# Altium PCB ra1.PcbDoc
Units mil, origin at the board's own origin, x right, y up, seen from the top; angles counter-clockwise.
Board outline 1125 x 500 mil, 2 copper layers (Top Layer, Bottom Layer); 6 components, 2 nets, 24 pads, 0 vias.
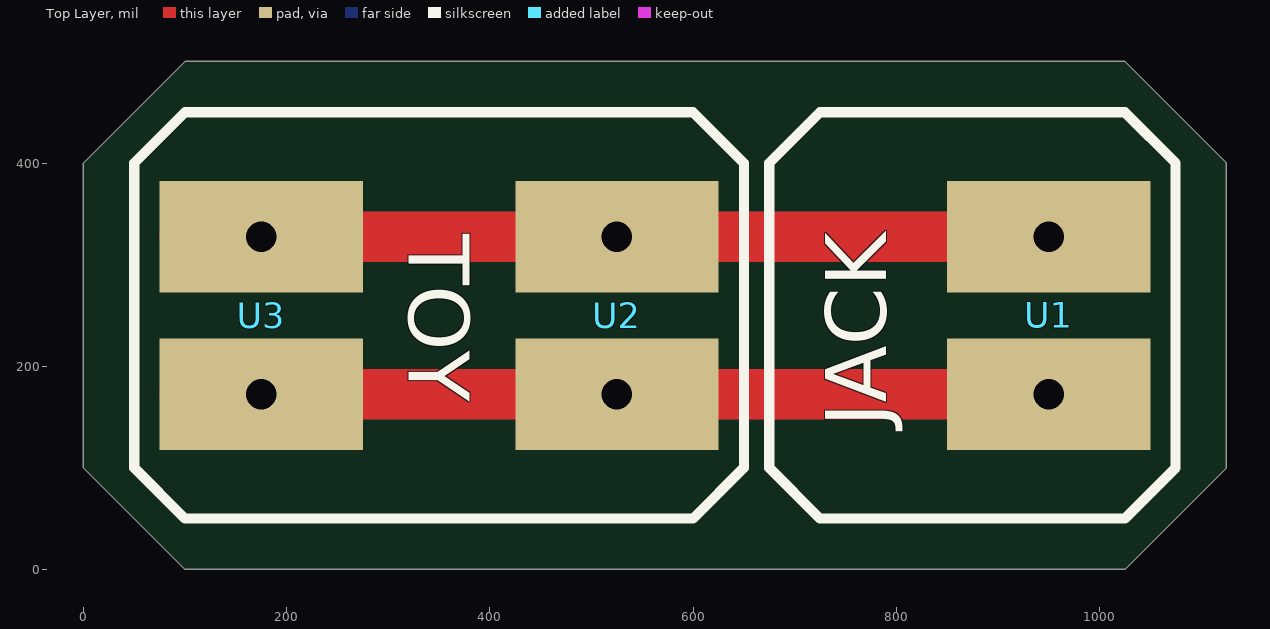
[diagram p0: Top Layer view]
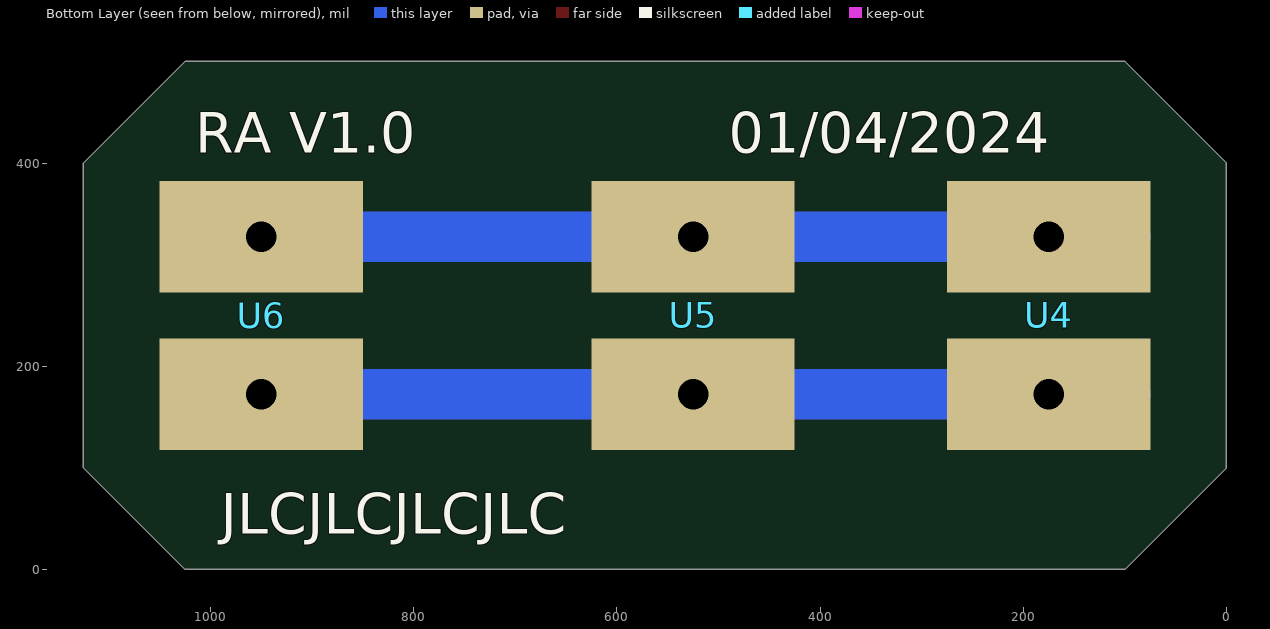
[diagram p1: Bottom Layer view, seen from below]

## Layer stack, top to bottom
Top Solder: solder mask 0.4, Solder Resist, Dk 3.5
Top Layer: signal copper 1.4
Dielectric 1: dielectric 12.6, FR-4, Dk 4.8
Bottom Layer: signal copper 1.4
Bottom Solder: solder mask 0.4, Solder Resist, Dk 3.5

## Board outline
100,0 0,100 0,400 100,500 1025,500 1125,400 1125,100 1025,0

## Design rules (kind name [scope] priority, off if disabled: settings)
BoardOutlineClearance BoardOutlineClearance_1 [not OnLayer('Top Overlay')] p1: gap=15 ignorepadtopadclearanceinfootprint=FALSE except(0: Arc-SplitContinuation Track-SplitContinuation SMDPad-SplitContinuation THPad-SplitContinuation Via-SplitContinuation Fill-SplitContinuation Poly-SplitContinuation Region-SplitContinuation Text-SplitContinuation)
Clearance [All] p1: gap=5 ignorepadtopadclearanceinfootprint=FALSE except(7.5: Arc-Hole Track-Hole SMDPad-Hole THPad-Hole Via-Hole Fill-Hole Poly-Hole Region-Hole Text-Hole)
ComponentClearance [All] p1 off: gap=10 collisioncheckmode=3 verticalgap=10 showdistances=FALSE
DiffPairsRouting [All] p1: maxlimit=5.5 minlimit=4.5 mostfreqgap=5 toplayer_minwidth=7 toplayer_maxwidth=8 toplayer_prefwidth=7.5 bottomlayer_minwidth=7 bottomlayer_maxwidth=8 bottomlayer_prefwidth=7.5 maxuncoupledlength=500
FabricationTestPointUsage TestPointUsage [All] p1: valid=0 allowmultiple=FALSE
FabricationTestpoint Testpoint [All] p1: side=3 testpointundercomponent=TRUE minsize=40 maxsize=100 preferedsize=60 minholesize=0 maxholesize=40 preferedholesize=32 testpointgrid=1 allowsidetop=TRUE allowsidebottom=TRUE usegrid=TRUE gridtolerance=0.01
MatchedLengths [All] p1: tolerance=100 checknetsindiffpair=TRUE checkdiffpairvsdiffpair=FALSE checkxsignals=FALSE checkothers=FALSE
MinimumSolderMaskSliver [All] p1: minsoldermaskwidth=0
PlaneClearance [All] p1: clearance=7.5
PlaneConnect [All] p1: pad.planeconnectstyle=Relief pad.reliefexpansion=20 pad.reliefentries=4 pad.reliefconductorwidth=10 pad.reliefairgap=10 via.planeconnectstyle=Direct via.reliefexpansion=20 via.reliefentries=4 via.reliefconductorwidth=10 via.reliefairgap=10
PolygonConnect [All] p1: connectstyle=Relief reliefconductorwidth=10 reliefentries=4 polygonreliefangle="90 Angle" airgapwidth=10
RoutingVias [All] p1: holewidth=12 width=24 viastyle="Through Hole" minholewidth=12 minwidth=24 maxholewidth=12 maxwidth=24
SolderMaskExpansion [All] p1: expansion=1.97 istentingtop=FALSE
Width [All] p1: maxlimit=100 minlimit=5 preferedwidth=5 minimp=50.000000 maximp=50.000000 favimp=50.000000
23 further rules are at their usual default settings.

## Components (designator, comment, footprint, x,y, rotation, side; value= is the part's Value field where it differs from the comment)
U1 "BIGPAD2" BIGPAD2 950,172.5 r90 top
U2 "BIGPAD2" BIGPAD2 525,172.5 r90 top
U3 "BIGPAD2" BIGPAD2 175,172.5 r90 top
U4 "BIGPAD2" BIGPAD2 175,172.5 r90 bottom
U5 "BIGPAD2" BIGPAD2 525,172.5 r90 bottom
U6 "BIGPAD2" BIGPAD2 950,172.5 r90 bottom

## Footprints (in the part's own frame and the unit in brackets; to place one, negate y for a bottom-side part, rotate by r counter-clockwise, add the part's x,y. Pads: shape width x height; smd on the part's side, far side on the other; paste and mask are expansions set on the pad)
BIGPAD2 [mil]
  rect 110x200 smd: 1(0,0) 2(155,0)
  round 60 hole 30: 1(0,0) 2(155,0)

## Nets (pads, with @x,y where several pads share a name; then routed paths per layer and width w, separated by ;. In a path a pad name is that pad's centre, name@x,y a point inside that pad or via, vN(x,y) a via of type N, cw(c..) or ccw(c..) an arc to the next point about the centre after c; other vN are vias at no path point)
NetU1_1: U1.1 U2.1 U3.1 U4.1 U5.1 U6.1 | length 1700
  Top Layer w50: U3.1@100,172.5 525,172.5 U1.1@950,172.5
  Bottom Layer w50: U4.1@100,172.5 525,172.5 U6.1@950,172.5
NetU1_2: U1.2 U2.2 U3.2 U4.2 U5.2 U6.2 | length 1700
  Top Layer w50: U3.2@100,327.5 525,327.5 U1.2@950,327.5
  Bottom Layer w50: U4.2@100,327.5 525,327.5 U6.2@950,327.5

## Silkscreen, mask and mechanical layers (free items; w line width, h text height)
Top Overlay:
  lines w10: 50,100 50,400 100,450 600,450 650,400 650,100 600,50 100,50 50,100 ; 675,100 725,50 1025,50 1075,100 1075,400 1025,450 725,450 675,400 675,100
  text "TOY" at 320.01,329.97 h60 r270
  text "JACK" at 790,140.04 h60 r90
Bottom Overlay:
  text "01/04/2024" at 490,410 h40
  text "RA V1.0" at 1015,410 h40
  text "JLCJLCJLCJLC" at 990,35 h40
Mechanical 1:
  the board outline again, w25